# Altium PCB TruckCape for Hammond 1455L - Rev4 - MITM.PcbDoc
Units mil, origin at the board's own origin, x right, y up, seen from the top; angles counter-clockwise.
Board outline 3917.04 x 4734.44 mil, 2 copper layers (Component Side, Bottom Layer), stack 12.8 mil thick; 48 components, 66 nets, 355 pads, 31 vias.
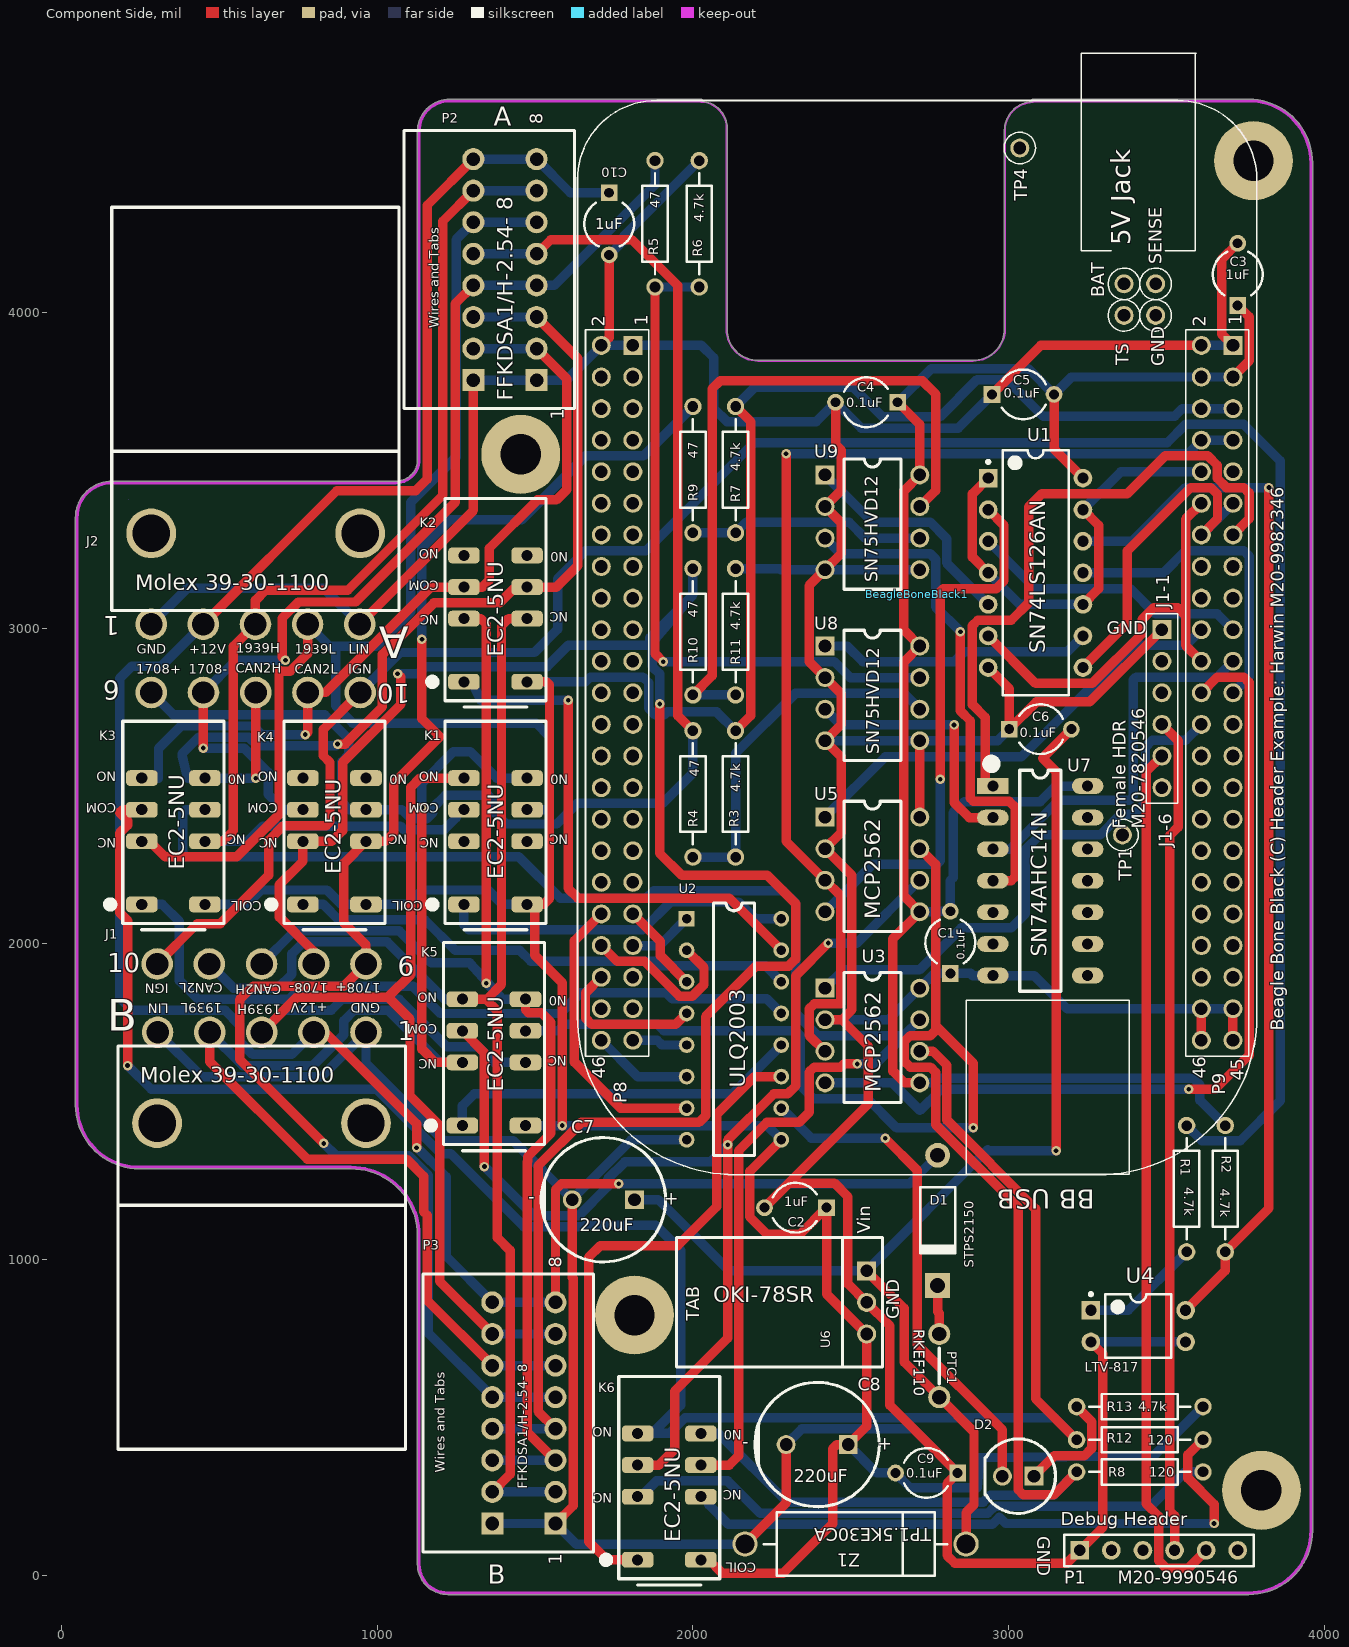
[diagram p0: Component Side view]
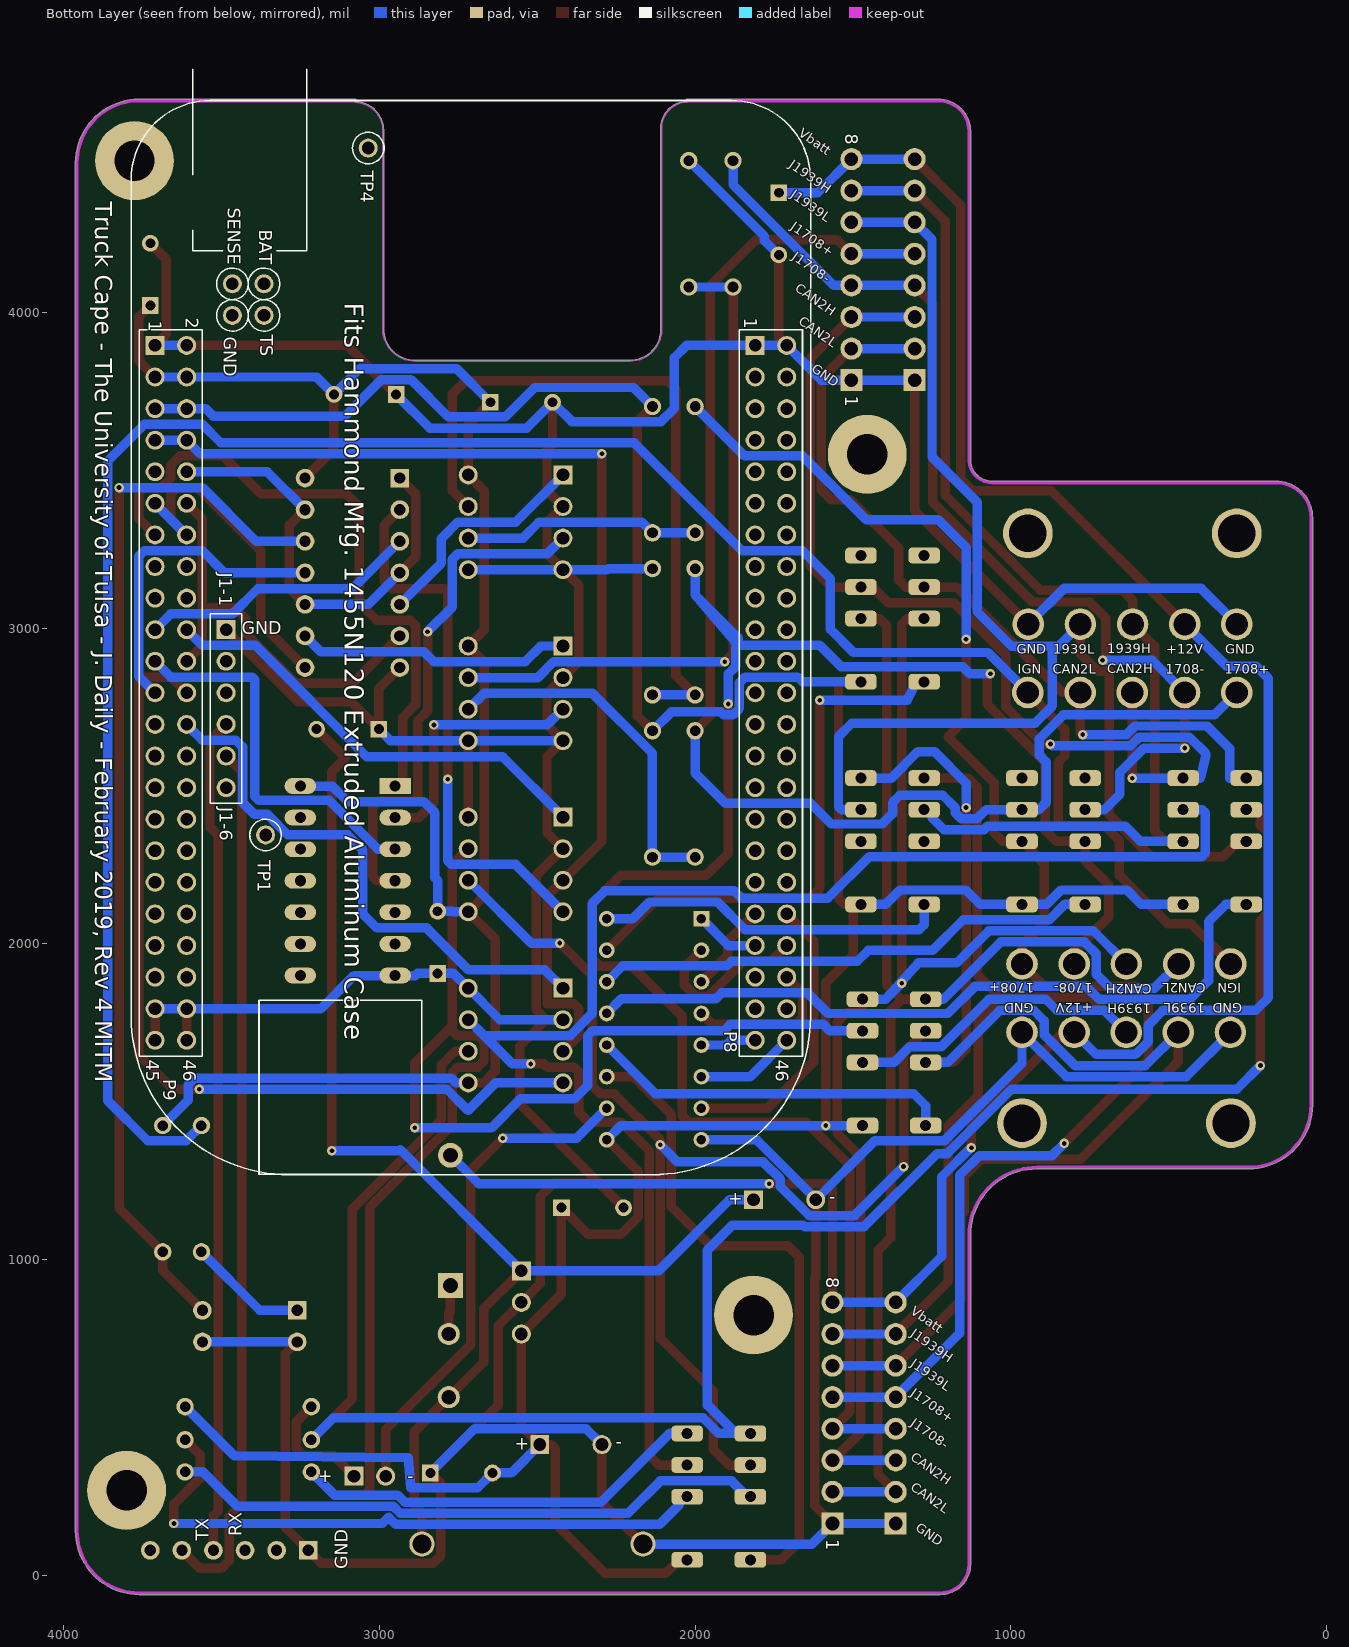
[diagram p1: Bottom Layer view, seen from below]

## Layer stack, top to bottom
Top Solder: solder mask 0.4, Solder Resist, Dk 3.5
Component Side: signal copper 1.4
Dielectric 1: core 10, FR-4, Dk 4.2
Bottom Layer: signal copper 1.4
Solder Side: solder mask 0.4, Solder Resist, Dk 3.5

## Board outline
44.99,1489.82 cw(c246.85,1489.85) 44.99,1489.85 44.98,1489.85 44.98,3350 cw(c160,3350) 160,3465.02 cw(c160,3460) 160.03,3465.01 1059.98,3465.01 ccw(c1059.5,3533.5) 1127.99,3533.5 ccw(c1059.5,3533.5) 1127.99,3533.97 cw(c1133,3534) 1127.98,3534 1127.98,4573 cw(c1229.41,4573) 1229.35,4674.42 cw(c1229.41,4669.41) 1229.41,4674.43 2024.38,4674.43 cw(c2024.38,4669.41) 2029.4,4669.41 cw(c2024.38,4669.41) 2029.05,4667.57 cw(c2024.38,4583.64) 2108.44,4583.69 cw(c2105.92,4583.64) 2108.44,4583.64 2108.44,3945.4 cw(c2105.92,3945.4) 2108.44,3945.35 cw(c2205.92,3945.4) 2108.44,3945.4 ccw(c2105.92,3945.4) 2108.44,3945.4 2108.44,3945.35 ccw(c2205.92,3945.4) 2205.87,3847.91 ccw(c2205.92,3945.4) 2205.92,3847.91 2886.92,3847.91 cw(c2886.92,3845.4) 2886.98,3847.91 ccw(c2886.98,3947.34) 2986.41,3947.28 2986.41,4575.72 cw(c3077.62,4575.72) 3073.32,4666.82 cw(c3077.62,4669.41) 3077.62,4674.43 3760.16,4674.43 cw(c3760.16,4669.41) 3760.24,4674.42 ccw(c3760.16,4472.56) 3760.16,4674.42 3760.24,4674.42 cw(c3760.16,4472.56) 3962.02,4472.59 cw(c3760.16,4472.56) 3962.02,4472.56 ccw(c3957.01,4472.56) 3962.02,4472.59 3962.02,4472.56 3962.02,141.85 cw(c3957.01,141.85) 3962.02,141.82 ccw(c3760.16,141.85) 3962.02,141.85 3962.02,141.82 cw(c3760.16,141.85) 3760.19,-60.01 cw(c3760.16,141.85) 3760.16,-60.01 ccw(c3760.16,-55) 3760.19,-60.01 3760.16,-60.01 1224,-60.01 cw(c1224,36) 1127.98,36 1127.98,1077.01 ccw(c917.01,1077.01) 917.01,1287.99 246.85,1287.99 cw(c246.85,1489.85)

## Design rules (kind name [scope] priority, off if disabled: settings)
Clearance [All] p1: gap=5 ignorepadtopadclearanceinfootprint=FALSE except(0: Arc-Hole Track-Hole SMDPad-Hole THPad-Hole Via-Hole Fill-Hole Poly-Hole Region-Hole Text-Hole)
HoleSize [All] p1: absolutevalues=TRUE maxlimit=250 minlimit=13 maxpercent=80.000 minpercent=20.000
MinimumSolderMaskSliver [All] p1: minsoldermaskwidth=1
PolygonConnect [All] p1: connectstyle=Relief reliefconductorwidth=10 reliefentries=4 polygonreliefangle="90 Angle" airgapwidth=10
RoomDefinition "TruckCape BeagleBone Headers v4 - MITM" [InComponentClass('TruckCape BeagleBone Headers v4 - MITM')] p1: confinementstyle=ConfineIn formatcopy=TRUE lockcomponents=FALSE outline -6912.02,-3824.24 -4912.02,-3824.24 -4912.02,-2824.24 -6912.02,-2824.24
RoutingVias [All] p1: holewidth=15 width=30 viastyle="Through Hole" minholewidth=13 minwidth=20 maxholewidth=20 maxwidth=30
SilkToSilkClearance [All] p1: silktosilkclearance=1
SilkToSolderMaskClearance [IsPad] p1: minsilkscreentomaskgap=1 clearancetoexposedcopper=TRUE
SolderMaskExpansion [All] p1: expansion=4
Width [All] p1: maxlimit=100 minlimit=10 preferedwidth=30 minimp=50.000000 maximp=50.000000 favimp=50.000000
26 further rules are at their usual default settings.

## Classes and differential pairs
component class "TruckCape J1708 and Relays v4 - MITM": C1 C5 J1 J2 K1 K2 K3 K4 K5 K6 P2 P3 R3 R4 R5 R6 R7 R8 R9 R10 R11 R12 U7 U8 U9
component class "TruckCape BeagleBone Headers v4 - MITM": BeagleBoneBlack1 C2 C3 C4 C6 C7 C8 C9 C10 D1 D2 P1 PTC1 R1 R2 R13 U1 U2 U3 U4 U5 U6 U? Z1

## Components (designator, comment, footprint, x,y, rotation, side; value= is the part's Value field where it differs from the comment)
BeagleBoneBlack1 "BeagleBoneBlack" Beagleboneblack 4220,3141.5 r90 top locked
C1 "0.1uF" CAPR5-4X5 2815,2005 r90 top
C2 "1uF" CAPR5-4X5 2325,1165 r180 top
C3 "1uF" CAPR5-4X5 3725,4120 r90 top
C4 "0.1uF" CAPR5-4X5 2550,3715 r180 top
C5 "0.1uF" CAPR5-4X5 3045,3740 r0 top
C6 "0.1uF" CAPR5-4X5 3100,2680 r0 top
C7 "220uF" "Elec. Cap 5 x 10mm" 1815,1190 r180 top
C8 "220uF" "Elec. Cap 5 x 10mm" 2491.85,415 r180 top
C9 "0.1uF" CAPR5-4X5 2740,325 r180 top
C10 "1uF" CAPR5-4X5 1735,4280 r270 top
D1 "STPS2150" DO-41 2775,1125 r270 top
D2 "LED" "LED - 5mm Through Hole" 3080,315 r0 top
J1 "Molex 39-30-1100" "10 pos Mini-Fit Jr. R/A Header" 965,1720 r0 top locked
J2 "Molex 39-30-1100" "10 pos Mini-Fit Jr. R/A Header" 284.99,3012.6 r180 top locked
K1 "EC2-5NU Relay-DPDT" "RELAY - EC2" 1275,2125 r90 top locked
K2 "EC2-5NU Relay-DPDT" "RELAY - EC2" 1275,2830 r90 top
K3 "EC2-5NU Relay-DPDT" "RELAY - EC2" 255,2125 r90 top locked
K4 "EC2-5NU Relay-DPDT" "RELAY - EC2" 765,2125 r90 top locked
K5 "EC2-5NU Relay-DPDT" "RELAY - EC2" 1270,1425 r90 top
K6 "EC2-5NU Relay-DPDT" "RELAY - EC2" 1825,50 r90 top
P1 "Use this part in J1-1 to J1-6" HDR1X6 3225,80 r0 top
P2 "Header 8H" "8 CKT Spring Header" 1505,3785 r90 top
P3 "Header 8H" "8 CKT Spring Header" 1565,165 r90 top
PTC1 "RKEF110" PTC 2780,640 r270 top
R1 "4.7k" Axial-0.4 3563.23,1225 r270 top
R2 "4.7k" Axial-0.4 3685.67,1225 r270 top
R3 "4.7k" Axial-0.4 2135,2475 r90 top
R4 "47" Axial-0.4 2000,2475 r90 top
R5 "47" Axial-0.4 1880,4280 r90 top
R6 "4.7k" Axial-0.4 2020,4280 r90 top
R7 "4.7k" Axial-0.4 2135,3501.67 r90 top
R8 "120" Axial-0.4 3415,328.23 r0 top
R9 "47" Axial-0.4 2000,3501.67 r90 top
R10 "47" Axial-0.4 2000,2988.33 r90 top
R11 "4.7k" Axial-0.4 2135,2988.33 r90 top
R12 "120" Axial-0.4 3415,430 r0 top
R13 "4.7k" AXIAL-0.4 3415,535 r180 top
U1 "SN74LS126AN" N14A 3085,3175 r0 top
U2 "ULQ2003" DIP16 1980,2080 r0 top
U3 "MCP2562" DIP8 2418.42,1860 r0 top
U4 "LTV-817" DIP-4 3410,790 r0 top
U5 "MCP2562" DIP8 2418.42,2401.67 r0 top
U6 "OKI-78SR" OKI-78SR 2550,765 r90 top
U7 "SN74AHC14N" DIP14 2950,2500 r0 top
U8 "SN75HVD12" DIP8 2418.42,2943.33 r0 top
U9 "SN75HVD12" DIP8 2418.42,3485 r0 top
Z1 "TP1.5KE30CA" DIODE-0.7 2515,100 r0 top

## Footprints (in the part's own frame and the unit in brackets; to place one, negate y for a bottom-side part, rotate by r counter-clockwise, add the part's x,y. Pads: shape width x height; smd on the part's side, far side on the other; paste and mask are expansions set on the pad)
"8 CKT Spring Header" [mil] "8 Position Wire to Board Terminal Block Vertical with Board 0.100\" (2.54mm) Through Hole"
  rect 70x70 hole 43: 1(0,200) 1(0,0)
  round 70 hole 43: 2(100,200) 2(100,0) 3(200,0) 3(200,200) 4(300,0) 4(300,200) 5(400,0) 5(400,200) 6(500,0) 6(500,200) 7(600,0) 7(600,200) 8(700,0) 8(700,200)
  silkscreen extent -90,-120 790,420
"10 pos Mini-Fit Jr. R/A Header" [mm] "Molex 10 position Mini-Fit Jr. Right Angle Header with Pegs, Series 5569"
  round 4 hole 3: 0(-16.8,-7.3) 0(0,-7.3)
  round 2.54 hole 1.803: 1(0,0) 2(-4.191,0) 3(-8.382,0) 4(-12.573,0) 5(-16.764,0) 6(0,5.5) 7(-4.2,5.5) 8(-8.4,5.5) 9(-12.6,5.5) 10(-16.8,5.5)
  silkscreen extent -19.94,-33.53 3.17,-1.1
Axial-0.4 [mm] "Axial Device, Thru-Hole; 2 Leads; 0.4 in Pin Spacing"
  round 1.4 hole 0.85: 1(-5.08,0) 2(5.08,0)
  silkscreen extent -4.06,-1.02 4.06,1.02
AXIAL-0.4 [mm] "Axial Device, Thru-Hole; 2 Leads; 0.4 in Pin Spacing"
  round 1.4 hole 0.85: 1(-5.08,0) 2(5.08,0)
  silkscreen extent -4.06,-1.02 4.06,1.02
Beagleboneblack [mil] "Flipped Headers, testpoints and Overlay for a BBB Rev C"
  rect 60x60 hole 40 mask+2: 1(753.5,510) J1-1(-146.5,735) P1(753.5,2410)
  round 60 hole 40 mask+2: 2(753.5,610) 3(653.5,510) 4(653.5,610) 5(553.5,510) 6(553.5,610) 7(453.5,510) 8(453.5,610) 9(353.5,510) 10(353.5,610) 11(253.5,510) 12(253.5,610) 13(153.5,510) 14(153.5,610) 15(53.5,510) 16(53.5,610) 17(-46.5,510) 18(-46.5,610) 19(-146.5,510) 20(-146.5,610) 21(-246.5,510) 22(-246.5,610) 23(-346.5,510) 24(-346.5,610) 25(-446.5,510) 26(-446.5,610) 27(-546.5,510) 28(-546.5,610) 29(-646.5,510) 30(-646.5,610) 31(-746.5,510) 32(-746.5,610) 33(-846.5,510) 34(-846.5,610) 35(-946.5,510) 36(-946.5,610) 37(-1046.5,510) 38(-1046.5,610) 39(-1146.5,510) 40(-1146.5,610) 41(-1246.5,510) 42(-1246.5,610) 43(-1346.5,510) 44(-1346.5,610) 45(-1446.5,510) 46(-1446.5,610) J1-2(-246.5,735) J1-3(-346.5,735) J1-4(-446.5,735) J1-5(-546.5,735) J1-6(-646.5,735) P2(753.5,2510) P3(653.5,2410) P4(653.5,2510) P5(553.5,2410) P6(553.5,2510) P7(453.5,2410) P8(453.5,2510) P9(353.5,2410) P10(353.5,2510) P11(253.5,2410) P12(253.5,2510) P13(153.5,2410) P14(153.5,2510) P15(53.5,2410) P16(53.5,2510) P17(-46.5,2410) P18(-46.5,2510) P19(-146.5,2410) P20(-146.5,2510) P21(-246.5,2410) P22(-246.5,2510) P23(-346.5,2410) P24(-346.5,2510) P25(-446.5,2410) P26(-446.5,2510) P27(-546.5,2410) P28(-546.5,2510) P29(-646.5,2410) P30(-646.5,2510) P31(-746.5,2410) P32(-746.5,2510) P33(-846.5,2410) P34(-846.5,2510) P35(-946.5,2410) P36(-946.5,2510) P37(-1046.5,2410) P38(-1046.5,2510) P39(-1146.5,2410) P40(-1146.5,2510) P41(-1246.5,2410) P42(-1246.5,2510) P43(-1346.5,2410) P44(-1346.5,2510) P45(-1446.5,2410) P46(-1446.5,2510) TP1(-796.5,860) TP4(1378.5,1185) TP5(948.5,855) TP6(948.5,755) TP7(848.5,855) TP8(848.5,755)
  silkscreen extent -1872,434 1678,2586
CAPR5-4X5 [mm] "Capacitor; 2 Leads"
  rect 1.35x1.35 hole 0.8: 1(-2.5,0)
  round 1.35 hole 0.8: 2(2.5,0)
  silkscreen extent -1.69,-2 1.82,2
DIODE-0.7 [mil] "Diode, Thru-Hole; 2 Leads; 0.7 in Pin Spacing"
  round 80 hole 60: 1(-350,0) 2(350,0)
  silkscreen extent -290,-100 290,100
DIP8 [mil]
  rect 60x60 hole 40: 1(0,0)
  round 60 hole 40: 2(0,-100) 3(0,-200) 4(0,-300) 5(300,-300) 6(300,-200) 7(300,-100) 8(300,0)
  silkscreen extent 60,-362 240,50
DIP14 [mil]
  rect 100x50 hole 35: 1(0,0)
  oval 100x50 hole 35: 2(0,-100) 3(0,-200) 4(0,-300) 5(0,-400) 6(0,-500) 7(0,-600) 8(300,-600) 9(300,-500) 10(300,-400) 11(300,-300) 12(300,-200) 13(300,-100) 14(300,0)
  silkscreen extent -19,-650 215,84
DIP16 [mil]
  rect 50x50 hole 30: 1(0,0)
  round 50 hole 30: 2(0,-100) 3(0,-200) 4(0,-300) 5(0,-400) 6(0,-500) 7(0,-600) 8(0,-700) 9(300,-700) 10(300,-600) 11(300,-500) 12(300,-400) 13(300,-300) 14(300,-200) 15(300,-100) 16(300,0)
  silkscreen extent 85,-750 215,50
DIP-4 [mm] "DIP; 4 Leads; Row Spacing 7.62 mm; Pitch 2.54 mm"
  rect 1.5x1.5 hole 0.9: 1(-3.81,1.27)
  round 1.5 hole 0.9: 2(-3.81,-1.27) 3(3.81,-1.27) 4(3.81,1.27)
  silkscreen extent -3.93,-2.55 2.65,2.69, body extent -3.15,-2.5 3.15,2.5, height 5.6
DO-41 [mm] "Diode, Axial; Body 5.2 x 2.7 mm (LxDia. max), Lead Dia. 0.86 mm (max)"
  round 2 hole 1.2: 1(-5.23,0)
  rect 2x2 hole 1.2: 2(5.23,0)
  silkscreen extent -2.65,-1.4 2.75,1.4
"Elec. Cap 5 x 10mm" [mil] "2 lead polarized Radial Capacitor with 5 mm lead spacing and 10 mm diameter can"
  rect 60x60 hole 40: 1(0,0)
  round 60 hole 40: 2(196.85,0)
  silkscreen extent -98,-197 295,197
HDR1X6 [mm] "Connector; Header; 6 Position"
  rect 1.5x1.5 hole 0.9: 1(0,0)
  round 1.5 hole 0.9: 2(2.54,0) 3(5.08,0) 4(7.62,0) 5(10.16,0) 6(12.7,0)
  silkscreen extent -1.27,-1.27 13.97,1.27
"LED - 5mm Through Hole" [mil] "Vishay TLCS510 Ultrabright LED, Ø 5 mm Untinted Non-Diffused Package"
  rect 60x60 hole 40: 1(0,0)
  round 60 hole 40: 2(-100,0)
  silkscreen extent -155,-118 68,118
N14A [mm] "DIP, 14-Leads, Row Spacing 7.62mm, Pitch 2.54mm, Body 19.18x6.35mm"
  rect 1.5x1.5 hole 0.9: 1(-3.81,7.62)
  round 1.5 hole 0.9: 2(-3.81,5.08) 3(-3.81,2.54) 4(-3.81,0) 5(-3.81,-2.54) 6(-3.81,-5.08) 7(-3.81,-7.62) 8(3.81,-7.62) 9(3.81,-5.08) 10(3.81,-2.54) 11(3.81,0) 12(3.81,2.54) 13(3.81,5.08) 14(3.81,7.62)
  silkscreen extent -3.93,-9.85 2.65,9.85, body extent -3.55,-9.85 3.55,9.85, height 5.08
OKI-78SR [mil] "Horizontal Mount SIP DC/DC Converter"
  rect 60x60 hole 40: 1(200,0)
  round 60 hole 40: 2(100,0) 3(0,0)
  silkscreen extent -105,-50 305,602
PTC [mil] "TE RGEF600-2"
  round 70 hole 45: 1(-125,0) 2(75,0)
  silkscreen extent -80,0 33,0
"RELAY - EC2" [mil] "EC2 Relay"
  rrect50% 50x100 hole 35: 1(300,0) 2(200,0) 3(400,0) 4(300,-200) 5(200,-200) 6(400,-200) 7(0,-200) 8(0,0)
  silkscreen extent -80,-260 580,110

## Part data
BeagleBoneBlack1: "46 Positions Header, Breakaway Connector 0.100\" (2.54mm) Through Hole Tin", Manufacturer="Sullins Connector Solutions", PartNumber=PREC023DAAN-RC, Supplier Part Number 1=S2012EC-23-ND, Supplier 1=Digi-Key
C1 C4 C5 C6 C9: library part Cap, "CAP CER 0.1UF 100V X7R RADIAL", Manufacturer="Vishay BC Components", PartNumber=K104K20X7RH53H5, Supplier Part Number 1=BC5139-ND, Supplier 1=Digi-Key
C2 C3 C10: library part Cap, "CAP CER 1UF 100V X7R RADIAL", Manufacturer="Murata Electronics North America", PartNumber=RDER72A105K2M1H03A, Supplier Part Number 1=490-9198-1-ND, Supplier 1=Digi-Key
C7 C8: library part "Electrolytic Cap", "220µF 50V Aluminum Electrolytic Capacitors Radial, Can 175 mOhm @ 10kHz 5000 Hrs @ 105°C", Manufacturer="EPCOS (TDK)", PartNumber=B41858C6227M000, Supplier Part Number 1=495-6000-ND, Supplier 1=Digi-Key
D1: library part "Diode 1N4003", "Diode Schottky 150V 2A Through Hole DO-15", Manufacturer=STMicroelectronics, Supplier Part Number 1=497-3213-1-ND, PartNumber=STPS2150, Supplier 1=Digi-Key
D2: "Green 569nm LED Indication - Discrete 2.1V Radial", Manufacturer="Lite-On Inc.", PartNumber=LTL-4233, Supplier Part Number 1=160-1130-ND, Supplier 1=Digi-Key
J1 J2: library part "10 Pos Header", "10 Positions Header Connector 0.165\" (4.20mm) Through Hole, Right Angle Tin", Manufacturer=Molex, PartNumber=39-30-1100, Supplier Part Number 1=WM1355-ND, Supplier 1=Digi-Key
K1 K2 K3 K4 K5 K6: library part Relay-DPDT, "General Purpose Relay DPDT (2 Form C) Through Hole", Manufacturer=KEMET, PartNumber=EC2-5NU, Supplier Part Number 1=399-11052-5-ND, LatestRevisionDate=17-Jul-2002, LatestRevisionNote="Re-released for DXP Platform.", PackageDescription="Relay; 8 Leads", PackageReference=DIP-P8, Published=24-Mar-1999, Publisher="Altium Limited", Supplier 1=Digi-Key
P1: library part "Header 6", "CONN HEADER FEMALE 6POS .1\" GOLD", Manufacturer="Sullins Connector Solutions", PartNumber=PPPC061LFBN-RC, Supplier Part Number 1=S7039-ND, Supplier 1=Digi-Key
P2 P3: "8 Position Wire to Board Terminal Block Vertical with Board 0.100\" (2.54mm) Through Hole", Manufacturer="Phoenix Contact", PartNumber=1789472, Supplier Part Number 1=277-14044-ND, LatestRevisionDate=17-Jul-2002, LatestRevisionNote="Re-released for DXP Platform.", Publisher="Altium Limited", Supplier 1=Digi-Key
PTC1: library part "SMD Resistor", "Polymeric PTC Resettable Fuse 60V 1.1A Ih Through Hole Radial, Disc", Manufacturer="Littelfuse Inc.", Supplier Part Number 1=RKEF110HF-ND, PartNumber=RKEF110, Supplier 1=Digi-Key
R1 R2 R3 R6 R7 R11: library part "Chip Resistor", "RES SMD 4.7K OHM 1% 1/10W 0603", Manufacturer=Yageo, PartNumber=CFR-25JB-52-4K7, Supplier Part Number 1=4.7KQBK-ND, Supplier 1=Digi-Key
R4 R5 R9 R10: library part "Chip Resistor", "47 Ohms ±5% 0.25W, 1/4W Through Hole Resistor Axial  Carbon Film", Manufacturer=Yageo, PartNumber=CFR-25JB-52-47R, Supplier Part Number 1=47QBK-ND, Supplier 1=Digi-Key
R8 R12: library part "Chip Resistor", "120 Ohms ±0.1% 0.25W, 1/4W Through Hole Resistor Axial  Metal Film", Manufacturer=Yageo, PartNumber=MFP-25BRD52-120R, Supplier Part Number 1=120ADCT-ND, Supplier 1=Digi-Key
R13: library part Res2, "RES SMD 4.7K OHM 1% 1/10W 0603", Manufacturer=Yageo, PartNumber=CFR-25JB-52-4K7, Supplier Part Number 1=4.7KQBK-ND, LatestRevisionDate=17-Jul-2002, LatestRevisionNote="Re-released for DXP Platform.", PackageDescription="Axial Device, Thru-Hole; 2 Leads; 0.4 in Pin Spacing", PackageReference=AXIAL-0.4, Published=8-Jun-2000, Publisher="Altium Limited", Supplier 1=Digi-Key
U1: library part DM74LS126AN, "Quad 3-State Buffer", Manufacturer="Texas Instruments", Supplier Part Number 1=296-3643-5-ND, ComponentLink1Description="Manufacturer Link", ComponentLink1URL=http://www.fairchildsemi.com/, DatasheetVersion=Mar-1998, LatestRevisionDate=29-May-2009, LatestRevisionNote="Component Body Added.", PackageDescription="DIP, 14-Pin, Row Spacing 7.62 mm, Pitch 2.54 mm", PackageReference=N14A, PackageVersion=2000, PartNumber=SN74LS126AN, Published=17-Jul-2002, Publisher="Altium Limited", Supplier 1=Digi-Key
U2: "High voltage, high current Darlington arrays each containing seven open collector Darlington pairswith common emitters.", Manufacturer="Texas Instruments", PartNumber=ULQ2003AN, Supplier Part Number 1=296-22623-5-ND, Supplier 1=Digi-Key
U3 U5: library part SN65HVD232DR, "1/1 Transceiver Half CAN 8-PDIP", Drivers Per Package=1, Manufacturer="Microchip Technology", PartNumber=MCP2562-E/P, Rating=Catalog, Supplier Part Number 1=MCP2562-E/P-ND, Supply Voltage(s)(V)=3.3, Code_JEDEC=MS-012AA, ComponentLink1Description=Datasheet, ComponentLink1URL=http://www.ti.com/general/docs/lit/getliterature.tsp?genericPartNumber=SN65HVD232&fileType=pdf, DatasheetVersion=SLOS346K, Eco-Plan="Green (RoHS & no Sb/Br)", ICC(Max)(mA)=17, Isolated=No, Mounting Technology="Surface Mount", PackageDescription="8-Pin Plastic Small Outline Integrated Circuit, 4.9 x 3.9 mm, Pitch 1.27 mm Pitch", PackageReference=D8, PackageVersion="revM, Jun-2011", Receivers Per Package=1, SubFamily=CAN, Supplier 1=Digi-Key, Supplier 2=Digi-Key, Supplier 3=Digi-Key, Supplier 4=Newark, Supplier 5=Mouser, Supplier Part Number 2=296-26344-1-ND, Supplier Part Number 3=296-26344-6-ND, Supplier Part Number 4=75C7753, Supplier Part Number 5=595-SN65HVD232DR, Transient Pulse Protection(V)="-25 to 25"
U4: library part Optoisolator1, "Optoisolator Transistor Output 5000Vrms 1 Channel 4-DIP", Manufacturer="Lite-On Inc.", Supplier Part Number 1=160-1366-5-ND, DatasheetVersion=Nov-2003, LatestRevisionDate=04-Mar-2005, LatestRevisionNote="Sch pins 3 & 4 Swapped.", PackageReference=DIP-4, PartNumber=LTV-817, Published=24-Mar-1999, Publisher="Altium Limited", Supplier 1=Digi-Key
U6: library part 7805, "5V DC/DC Converter (7805 replacement)", Manufacturer="Murata Power Solutions Inc.", PartNumber=OKI-78SR-5/1.5-W36H-C, Supplier Part Number 1=811-2692-ND, Supplier 1=Digi-Key, Supplier 2=Digi-Key, Supplier Part Number 2=811-2692-ND
U7: library part "74VHC14 Hex Inverter", "Inverter IC 6 Channel Schmitt Trigger 14-PDIP", Manufacturer="Texas Instruments", Supplier Part Number 1=296-4550-5-ND, PartNumber=SN74AHC14N, Supplier 1=Digi-Key
U8 U9: library part "SN75HVD12D (3.3v RS485)", "IC 3.3V DIFF TXRX 8-SOIC", Manufacturer="Texas Instruments", PartNumber=SN75HVD12P, Supplier 1=Digi-Key, Supplier Part Number 1=SN75HVD12P
Z1: library part Zener, "TVS DIODE 25.6V 41.4V DO201", Manufacturer="Littelfuse Inc.", Supplier Part Number 1=F7610CT-ND, PartNumber=TP1.5KE30CA, Supplier 1=Digi-Key

## Free pads (board coordinates)
  round 250 hole 128: 0(1455,3550) 0(1815,825) 0(3775,4480) 0(3800,270)

## Via types
v1: diameter 30, hole 15, Component Side to Bottom Layer, 31 vias

## Nets (pads, with @x,y where several pads share a name; then routed paths per layer and width w, separated by ;. In a path a pad name is that pad's centre, name@x,y a point inside that pad or via, vN(x,y) a via of type N, cw(c..) or ccw(c..) an arc to the next point about the centre after c; other vN are vias at no path point)
3V3: BeagleBoneBlack1.3 BeagleBoneBlack1.4 C1.2 C3.1 C4.1 C5.2 R2.1 U1.14 U3.5 U5.5 U7.14 U8.8 U9.8 | length 6032.1
  Component Side w30: C4.1 2718.42,3645 U9.8 2667.98,3434.56 2667.98,2993.78 U8.8 2667.98,2892.89 2667.98,2152.11 U5.5 2633.42,2016.67 2633.42,1597.56 2670.98,1560 U3.5 ; C5.2 3143.43,3566.57 U1.14 ; BeagleBoneBlack1.3 3760.98,3845.98 3760.98,3985.59 C3.1
  Bottom Layer w30: C4.1 2755,3821.58 3061.85,3821.58 C5.2 3198.43,3795 BeagleBoneBlack1.4 BeagleBoneBlack1.3 ; U3.5 2756.72,1560 2771.72,1575 3584.5,1575 3605,1554.5 3605,1505.67 R2.1 ; U5.5 2764.98,2101.67 2766.74,2103.43 C1.2 2815,2200.76 2823.98,2209.74 2823.98,2415.76 2858.98,2450.76 3099.98,2450.76 3149.22,2500 U7.14
5V0: BeagleBoneBlack1.5 BeagleBoneBlack1.6 C2.1 C8.1 C9.2 K1.7 K2.7 K3.7 K4.7 K5.7 K6.7 R3.2 R7.2 R13.1 U2.9 U6.3 | length 10631.6
  Component Side w30: K1.7 K1.7@1499.98,2125 ; K2.7 1535.98,2830 1545.98,2820 1545.98,2143.76 1527.22,2125 K1.7@1499.98,2125 ; v1(1585.98,1425) 1585.98,1877.76 1499.98,1963.76 K1.7@1499.98,2125 ; K6.7 2049.98,50 2092.22,7.76 2285.98,7.76 2442.98,164.76 2442.98,402 2455.98,415 C8.1 2550,473.15 U6.3 2423.43,891.57 C2.1 2339.19,1080.76 2234.98,1080.76 2179.98,1135.76 2179.98,1279.98 U2.9 ; R3.2 2182.98,2722.98 2182.98,3653.68 R7.2
  Bottom Layer w30: K3.7 587.22,2125 632.98,2170.76 841.22,2170.76 886.98,2125 K4.7 1097.22,2125 1142.98,2170.76 1351.22,2170.76 1396.98,2125 K1.7 ; K5.7 v1(1585.98,1425) 2235,1425 U2.9 ; K2.7 1659.98,2830 1674.98,2845 1841.74,2845 1860,2826.74 1860,2745.5 1880.5,2725 1909.5,2725 1919.26,2734.76 2075.24,2734.76 R3.2 ; R7.2 2195.1,3761.76 2507.64,3761.76 2600.98,3668.42 2781.83,3668.42 2899.98,3786.58 2993.15,3786.58 3108.96,3670.76 3525,3670.76 3549.24,3695 BeagleBoneBlack1.6 BeagleBoneBlack1.5 ; C8.1 2581.85,325 C9.2 2688.15,278.42 2899.75,278.42 2907.98,373.76 3458.76,378.76 R13.1
12V0: C6.2 C7.1 PTC1.2 U6.1 Z1.2 | length 3995.6
  Component Side w30: U6.1 2668.98,846.02 2668.98,676.02 PTC1.2 2889.98,455.02 2889.98,224.76 2865,199.78 Z1.2 ; v1(3150,1345) 3150,2545.54 3106.98,2588.56 C6.2
  Bottom Layer w30: C7.1 1890.74,1190 2115.74,965 U6.1 2933.76,1348.76 2937.52,1345 v1(3150,1345)
CAN2H-A: J2.8 K2.4 K3.6 P2.3 | length 3226.2
  Component Side w30: v1(615.7,2525) J2.8 ; v1(874.98,2632.76) 898.98,2632.76 1016.98,2750.76 1016.98,2916.76 1179.98,3079.76 1387.74,3079.76 1437.98,3130 K2.4 1567.98,3130 1635,3197.02 1635,3855 P2.3@1505,3985
  Bottom Layer w30: v1(615.7,2525) K3.6 399.98,2525 382.98,2594.76 382.98,2602.48 435.5,2655 593.24,2655 620.48,2627.76 869.98,2627.76 v1(874.98,2632.76) ; P2.3@1305,3985 P2.3@1505,3985
CAN2H-B: J1.8 K2.2 K5.6 P3.3 | length 4044.8
  Component Side w30: K2.2 1327.98,3030 1345.98,3012 v1(1345.98,1875.76) ; K5.6 1470,1791.76 1479,1782.76 1519.98,1782.76 1550.59,1752.15 1550.59,1400.37 1476.98,1326.76 1476.98,1311.76 1474.98,1309.76 1474.98,455.02 P3.3@1565,365
  Bottom Layer w30: J1.8 739.29,2041.54 1070,2041.54 1171.77,1939.76 1292.98,1939.76 1348.66,1878.18 1396.74,1825 ; v1(1345.98,1875.76) 1396.74,1825 ; P3.3@1365,365 P3.3@1565,365 ; K5.6 1396.74,1825
CAN2L-A: J2.9 K2.1 K3.3 P2.2 | length 2619.7
  Component Side w30: v1(772.98,2662.76) 781.05,2670.83 J2.9 837.28,2796.06 1171.22,3130 K2.1 1333.22,3130 1354.98,3151.76 1354.98,3252.76 1507.98,3405.76 1567.98,3405.76 1600,3437.78 1600,3790 P2.2@1505,3885
  Bottom Layer w30: K3.3 307.98,2525 307.98,2618.76 379.22,2690 607.74,2690 634.98,2662.76 v1(772.98,2662.76) ; P2.2@1305,3885 P2.2@1505,3885
CAN2L-B: J1.9 K2.5 K5.3 P3.2 | length 4191.1
  Component Side w30: K5.3 1343.98,1825 ; P3.2@1365,265 1420.98,320.98 1420.98,1029.76 1380.98,1069.76 1380.98,1788 1343.98,1825 ; K2.5 1416.22,3030 1393.98,3007.76 1393.98,1871.76 1347.22,1825 1343.98,1825
  Bottom Layer w30: J1.9 545.47,1860 685.88,1860 729.65,1903.76 729.65,1968.2 767.98,2006.54 1032.45,2006.54 1213.98,1825 K5.3 ; P3.2@1365,265 P3.2@1565,265
"Coil 1": K1.8 U2.16 | length 1134
  Bottom Layer w30: K1.8 1274.98,2060.76 1290.74,2045 1841.22,2045 1928.98,2132.76 2143.98,2132.76 2196.74,2080 U2.16
"Coil 2": K2.8 U2.15 | length 1718.6
  Component Side w30: v1(1604.98,2771.76) 1604.98,2176 1635.98,2145 2115,2145 U2.15
  Bottom Layer w30: K2.8 1299.98,2830 1327.98,2771.76 v1(1604.98,2771.76)
"Coil 3": K4.8 U2.14 | length 1616.5
  Bottom Layer w30: K4.8 829.98,2125 878.22,2076.76 1150.98,2076.76 1247.98,1979.76 1451.98,1979.76 1486.74,1945 1884.98,1945 1899.22,1930.76 2229.24,1930.76 U2.14
"Coil 4": K3.8 U2.13 | length 2365.3
  Bottom Layer w30: K3.8 319.98,2125 373.98,2071 373.98,1884 432.98,1825 721.08,1825 761.84,1865.76 1113.98,1865.76 1199.98,1779.76 1578.74,1779.76 1643.98,1845 1915.74,1845 1934.98,1825.76 2234.24,1825.76 U2.13
"Coil 5": K5.8 U2.12 | length 1152.4
  Bottom Layer w30: K5.8 1269.98,1487.76 1307.98,1525.76 2125.76,1525.76 U2.12
"Coil 6": K6.8 U2.11 | length 2097.4
  Component Side w30: K6.8 1727.74,50 1669.98,107.76 1669.98,1007.76 1706.98,1044.76 1951.98,1044.76 2074.98,1167.76 2074.98,1460.35 2194.64,1580 U2.11
DCAN0H: K5.4 K6.6 R8.1 U5.7 | length 5885.8
  Component Side w30: U5.7 2768.42,2251.67 2768.42,1741.32 ; v1(2887.98,1417.76) 2887.98,1621.76 2768.42,1741.32 ; R8.1 3142.53,255.76 3046,255.76 3030,271.76 3030,1166.74 2768.42,1428.32 2768.42,1593.56 2751.98,1610 2687.98,1610 2668.42,1629.56 2668.42,1690.44 2687.98,1710 2751.98,1710 2768.42,1726.44 2768.42,1741.32
  Bottom Layer w30: K5.4 1573.98,1725 1593.98,1745 1888.74,1745 1907.98,1725.76 2323.98,1725.76 2339.98,1709.76 2339.98,1551.76 2381.98,1509.76 2552.86,1509.76 2644.86,1417.76 v1(2887.98,1417.76) ; K6.6 2080.74,450 2298.51,232.23 2918.88,232.23 2941.65,255 3141.77,255 R8.1
DCAN0L: K5.1 K6.1 U5.6 | length 3740.3
  Component Side w30: K5.1 1340,1655 v1(1340,1295) ; K6.1 1892.22,350 1941.98,399.76 1941.98,583.76 2109.98,751.76 v1(2109.98,1364.24) 2109.98,1379 2255.98,1525 2300,1525 2325.98,1550.98 2325.98,1900 v1(2428.74,2002.76)
  Bottom Layer w30: v1(1340,1295) 1495,1140 1638.86,1140 1729.98,1231.12 1729.98,1255.26 1784.72,1310 2055.74,1310 v1(2109.98,1364.24) ; v1(2428.74,2002.76) 2519.52,2002.76 U5.6
DCAN1H: K3.4 K6.4 U3.7 | length 4865.2
  Component Side w30: K6.4 2114.98,350 2144.98,380 2144.98,1345.76 2233.98,1434.76 2335.98,1434.76 2367.98,1466.76 2367.98,1594 2383.98,1610 2468.87,1610 2478.87,1620 v1(2520,1620)
  Bottom Layer w30: K3.4 394.22,2425 384.98,2415.76 384.98,2287.76 396.98,2275.76 1449.22,2275.76 1579.98,2145 1853.22,2145 1875.98,2167.76 2285.98,2167.76 2325.98,2127.76 2325.98,1779.52 2395.51,1710 2668.42,1710 ; v1(2520,1620) 2578.42,1620 2668.42,1710 ; U3.7 2668.42,1710
DCAN1L: K3.1 K6.3 R12.1 U3.6 | length 6419.4
  Component Side w30: v1(210,1615) 210,2074.04 185,2099.04 185,2350.96 210,2375.96 210,2390.74 184.98,2415.76 194.22,2425 K3.1 ; U3.6 2759.74,1660 2803.98,1615.76 2803.98,1442.26 3084.98,1161.26 3084.98,560.02 R12.1
  Bottom Layer w30: v1(210,1615) 285,1540 997.74,1540 1201.98,1335.76 1233.98,1335.76 1464.74,1105 1653.36,1105 1657.12,1108.76 1882.98,1108.76 1960.98,1030.76 1960.98,540 K6.3@1870.98,450 ; K6.3 K6.3@1870.98,450 ; R12.1 3145,500 1974.98,500 1924.98,450 K6.3@1870.98,450
DEBUGRX: BeagleBoneBlack1.J1-4 P1.4 | length 2653.1
  Component Side w30: BeagleBoneBlack1.J1-4 3535.98,2644.02 3535.98,2369.76 3509.98,2343.76 3509.98,204.76 3525,189.74 P1.4
DEBUGTX: BeagleBoneBlack1.J1-5 P1.5 | length 2768.6
  Component Side w30: BeagleBoneBlack1.J1-5 3434.98,2544.98 3434.98,227.76 3474.98,187.76 3474.98,47.76 3499.98,22.76 3567.76,22.76 P1.5
GND: BeagleBoneBlack1.1 BeagleBoneBlack1.2 BeagleBoneBlack1.43 BeagleBoneBlack1.44 BeagleBoneBlack1.45 BeagleBoneBlack1.46 BeagleBoneBlack1.J1-1 BeagleBoneBlack1.P1 BeagleBoneBlack1.P2 C1.1 C2.2 C3.2 C4.2 C5.1 C6.1 C7.2 C8.2 C9.1 C10.2 J1.1 J1.5 J2.1 J2.5 P1.1 P2.1 P3.1 R6.2 R11.2 U1.7 U2.8 U3.2 U3.8 U4.2 U4.3 U5.2 U5.8 U6.2 U7.7 U8.2 U8.4 U8.5 U9.2 U9.4 U9.5 Z1.1 | length 20403.5
  Component Side w30: J2.5 1305,3372.61 P2.1@1305,3785 ; P3.1@1565,165 1620.98,220.98 1620.98,940.76 1618.15,943.59 C7.2 ; BeagleBoneBlack1.P2 1735,3920 C10.2 ; Z1.1 2295,230 C8.2 ; C2.2 2304.34,1242.76 ; U3.2 2471.19,1760 ; C4.2 2451.57,3581.17 2468.98,3563.76 2468.98,3435.56 U9.2 2468.98,3334.44 2468.98,3235.56 U9.4 2367.98,3134.56 2367.98,2893.78 U8.2 2468.98,2792.78 2468.98,2693.89 U8.4 2468.98,2592.78 2468.98,2352.22 U5.2 2503.42,2216.67 2503.42,1791.76 2471.66,1760 2471.19,1760 ; U5.8 U8.5 ; U1.7 3001.57,2808.43 C6.1 3087.74,2766.17 3256.17,2766.17 BeagleBoneBlack1.J1-1 ; C5.1 3101.57,3895 BeagleBoneBlack1.2 ; U4.2 3297.56,702.44 3297.56,152.56 P1.1 3184.76,39.76 2828.98,39.76 2804.98,63.76 2804.98,291.56 C9.1 2623.98,539.44 2623.98,791.02 U6.2 2490.98,924.02 2490.98,1199.76 2447.98,1242.76 2304.34,1242.76 ; BeagleBoneBlack1.46 BeagleBoneBlack1.44 ; BeagleBoneBlack1.45 BeagleBoneBlack1.43 ; BeagleBoneBlack1.1 3673.98,3931.02 3673.98,4167.41 C3.2 ; 2304.34,1242.76 2555,1493.42 2555,1676.19 2471.19,1760
  Bottom Layer w30: J2.1 398.15,3125.76 831.82,3125.76 J2.5 ; J1.5 445,1580 825,1580 J1.1 965,1622.24 1209.88,1377.36 1430.79,1377.36 C7.2 1618.15,1192.92 1805.23,1380 U2.8 ; P2.1@1305,3785 1505,3785 1600,3785 BeagleBoneBlack1.P2 BeagleBoneBlack1.P1 2026.74,3895 2065.98,3855.76 2065.98,3695.76 2107.98,3653.76 2390.34,3653.76 C4.2 2533.15,3633.42 2840,3633.42 C5.1 ; P3.1@1365,165 1565,165 1630,100 Z1.1 ; C10.2 1780.98,4227.56 1780.98,4240.98 R6.2 ; R11.2 2274.98,3188.33 2278.32,3185 U9.4 U9.5 ; C8.2 2345,465 2698.43,465 C9.1 ; U3.2 2618.42,1760 U3.8 2765,1906.57 C1.1 2878.98,1906.57 2885.56,1900 U7.7 3079.98,1900 3184.98,1795 BeagleBoneBlack1.44 BeagleBoneBlack1.43 ; U8.4 U8.5 2964.91,2643.33 C6.1 ; U4.2 U4.3 ; BeagleBoneBlack1.2 BeagleBoneBlack1.1
IGNITION: J1.10 J2.10 R1.1 | length 7065.6
  Component Side w30: J1.10 430.81,2063.76 502.98,2063.76 656.98,2217.76 656.98,2327.76 703.98,2374.76 838.98,2374.76 850.98,2386.76 850.98,2574.44 829.78,2595.64 829.78,2679.44 J2.10
  Bottom Layer w30: J2.10 1073.1,2922.76 1497.98,2922.76 1571.98,2996.76 1571.98,3157 1659.98,3245 1851.22,3245 2192.98,3586.76 3501.74,3586.76 3559.98,3645 3743.98,3645 3858.98,3530 3858.98,1502.76 3732.98,1376.76 3611.47,1376.76 R1.1
J1708+A: J2.6 K4.4 P2.5 R4.2 | length 4483.1
  Component Side w30: P2.5@1505,4185 1549.76,4229.76 1806.98,4229.76 1951.98,4084.76 1951.98,2723.02 R4.2
  Bottom Layer w30: J2.6 355.29,2725.76 834.03,2725.76 909.98,2649.81 909.98,2597.76 888.73,2576.51 888.73,2447.76 911.49,2425 K4.4 1078.74,2425 1106.98,2396.76 1157.98,2396.76 1176.98,2415.76 1176.98,2431.76 1215.98,2470.76 1351.98,2470.76 1374.98,2447.76 1374.98,2412.76 1407.98,2379.76 1568.74,2379.76 1633.98,2445 1903.98,2445 2000,2541.02 R4.2 ; P2.5@1305,4185 P2.5@1505,4185
J1708+B: J1.6 K4.5 P3.5 R9.2 | length 4947.4
  Component Side w30: v1(831.26,1368.49) 564.98,1634.76 564.98,1823.54 607.98,1866.54 895,1866.54 J1.6 965,1996.74 894.98,2066.76 894.98,2254.98 K4.5 1026.22,2325 1052.98,2351.76 1052.98,2509.76 1198.98,2655.76 1141.98,2712.76 v1(1141.98,2965)
  Bottom Layer w30: v1(831.26,1368.49) 869.69,1330.05 1099.98,1330.05 1161.98,1268.05 1161.98,768.02 1365,565 P3.5@1565,565 ; v1(1141.98,2965) 1141.98,3254.76 1230.98,3343.76 1458.74,3343.76 1659.98,3545 1843.33,3545 R9.2
J1708-A: J2.7 K4.1 P2.4 R5.2 | length 3245.4
  Component Side w30: v1(450,2620) 450,2795.72 J2.7 ; v1(709.99,2898.35) 700,2908.33 700,3031.6 750.99,3082.6 931.82,3082.6 1246.98,3397.76 1246.98,4026.98 P2.4@1305,4085
  Bottom Layer w30: v1(450,2620) 578.74,2620 654.98,2543.76 654.98,2474 703.98,2425 K4.1 ; J2.7 552.62,2898.35 v1(709.99,2898.35) ; P2.4@1305,4085 1505,4085 1561.22,4085 1880,4403.78 R5.2
J1708-B: J1.7 K4.2 P3.4 R10.2 | length 6195.5
  Component Side w30: J1.7 799.65,1976.1 690.98,2084.76 690.98,2187.74 765,2261.76 K4.2 857.22,2325 890.98,2358.76 890.98,2574.44 1075,2758.46 1075,2845.76 v1(1065,2855.76) ; P3.4@1565,465 1509.98,520.02 1509.98,1297.76 1646.98,1434.76 2018.98,1434.76 2039.98,1455.76 2039.98,1769.86 2199.89,1929.76 2302.98,1929.76 2325,1951.78 2325,2127.76 2235,2217.76 1964.02,2217.76 1895,2286.78 v1(1895,2760)
  Bottom Layer w30: v1(1065,2855.76) 1130.98,2855.76 1153.36,2878.14 1538.13,2878.14 1604.98,2945 1863.98,2945 ; P3.4@1365,465 P3.4@1565,465 ; v1(1895,2760) 1895,2854.82 1870.98,2878.84 1870.98,2938 1863.98,2945 ; R10.2 2000,3105.02 ; 1863.98,2945 1863.98,2969 2000,3105.02 ; 1863.98,2945 2000,3105.02
J1939H-A: J2.3 K1.1 K3.5 P2.7 | length 3683.3
  Component Side w30: K3.5 511.98,2325 544.98,2358 544.98,2942.59 J2.3 614.99,3087.76 646.99,3119.76 906.98,3119.76 1207.98,3420.76 1207.98,4287.98 P2.7@1305,4385
  Bottom Layer w30: K3.5 589.98,2325 637.98,2373 1073.74,2373 1084.98,2361.76 1211.98,2361.76 1249.98,2399.76 1249.98,2425 K1.1 ; P2.7@1305,4385 P2.7@1505,4385
J1939H-B: J1.3 K1.3 K5.5 P3.7 | length 3690.3
  Component Side w30: J1.3 746.54,1831.54 1034.76,1831.54 ; 1040,1831.54 1034.76,1831.54 ; K1.3 1135.98,2525 1106.98,2496 1106.98,1903.76 1034.76,1831.54 ; P3.7@1365,765 1198.6,931.4 1198.6,1425.15 1104.28,1519.46 1104.28,1762.01 1034.76,1831.54
  Bottom Layer w30: J1.3 705,1790 854.98,1790 889.98,1825 1070,1825 1220.24,1674.76 1320.22,1674.76 1369.98,1625 K5.5 ; P3.7@1365,765 P3.7@1565,765
J1939L-A: J2.4 K1.4 K3.2 P2.6 | length 4304.1
  Component Side w30: K3.2 279.98,2325 329.22,2275.76 555.48,2275.76 689.48,2409.76 689.48,2867.26 691.57,2867.26 695.49,2863.35 724.49,2863.35 779.99,2918.85 J2.4
  Bottom Layer w30: J2.4 849.99,2942.6 ; K1.4 1535.98,2425 1545.98,2435 1545.98,2656.76 1503.98,2698.76 923.73,2698.76 868.98,2753.51 868.98,2923.6 849.99,2942.6 ; P2.6@1505,4285 1305,4285 1249.98,4229.98 1249.98,3541.76 1106.98,3398.76 1106.98,3051.76 997.82,2942.6 849.99,2942.6
J1939L-B: J1.4 K1.6 K5.2 P3.6 | length 4216.1
  Component Side w30: J1.4 470,1627.74 778.98,1318.76 1092.98,1318.76 1147.98,1263.76 1147.98,1151.76 1158.98,1140.76 1158.98,871.02 P3.6@1365,665 ; v1(1141.98,2431.76) 1141.98,1667 1183.98,1625 K5.2
  Bottom Layer w30: J1.4 575,1615 796.98,1615 895,1713.02 895,1757.02 927.98,1790 1035,1790 1200,1625 K5.2 ; v1(1141.98,2431.76) 1141.98,2508.76 1241.98,2608.76 1294.98,2608.76 1378.74,2525 K1.6 ; P3.6@1365,665 P3.6@1565,665
LED1: BeagleBoneBlack1.P38 U2.7 | length 919.8
  Component Side w30: BeagleBoneBlack1.P38 1624.98,2009.98 1624.98,1625.76 1770.74,1480 U2.7
NetBeagleBoneBlack1_9: BeagleBoneBlack1.9
NetBeagleBoneBlack1_10: BeagleBoneBlack1.10 U1.1 U1.4 U1.10 U1.13 | length 1449
  Component Side w30: U1.4 2884.98,3225.02 2884.98,3424.98 U1.1 ; U1.10 3284.98,3124.98 3284.98,3325.02 U1.13
  Bottom Layer w30: U1.4 3035,3075 U1.10 ; U1.13 3355,3495 BeagleBoneBlack1.10
NetBeagleBoneBlack1_11: BeagleBoneBlack1.11 BeagleBoneBlack1.14 U1.8 | length 1096.2
  Component Side w30: U1.8 3375.98,3015.98 3375.98,3244.76 3576.22,3445 3639.74,3445 3660.98,3423.76 3660.98,3345.98 BeagleBoneBlack1.14
  Bottom Layer w30: BeagleBoneBlack1.14@3610,3295.02 BeagleBoneBlack1.11
NetBeagleBoneBlack1_12: BeagleBoneBlack1.12 BeagleBoneBlack1.22 U1.6 | length 1364.9
  Component Side w30: U1.6 3085.24,2824.76 3263.98,2824.76 3422.98,2983.76 3422.98,3028.76 3459.22,3065 3535,3065 3559.98,3040.02 ; BeagleBoneBlack1.22 3559.98,2945.02 3559.98,3040.02 ; BeagleBoneBlack1.12 3559.98,3344.98 3559.98,3040.02
NetBeagleBoneBlack1_13: BeagleBoneBlack1.13 U7.1 | length 2052.8
  Component Side w30: U7.1 2924.98,2500 2924.98,2717.76 2884.98,2757.76 2884.98,3007.76 2901.98,3024.76 3007.98,3024.76 3062.98,3079.76 3062.98,3383.76 3103.98,3424.76 3374.74,3424.76 3494.98,3545 3630.71,3545 3660,3515.71 3660,3474.29 3689.29,3445 3743.98,3445 3760.98,3428 3760.98,3345.98 BeagleBoneBlack1.13
NetBeagleBoneBlack1_16: BeagleBoneBlack1.16
NetBeagleBoneBlack1_19: BeagleBoneBlack1.19 U1.3 | length 891
  Bottom Layer w30: U1.3 3085.24,3124.76 3384.98,3124.76 3464.74,3045 3660,3045 BeagleBoneBlack1.19
NetBeagleBoneBlack1_20: BeagleBoneBlack1.20 U5.1 | length 1437.3
  Bottom Layer w30: U5.1 2609.52,2592.76 3039.98,2592.76 3392.22,2945 3560,2945 BeagleBoneBlack1.20
NetBeagleBoneBlack1_21: BeagleBoneBlack1.21 U7.3 | length 1222.9
  Bottom Layer w30: U7.3 3004.22,2300 3158.98,2454.76 3382.2,2454.76 3394.98,2467.54 3394.98,2837 3402.98,2845 3660,2845 BeagleBoneBlack1.21
NetBeagleBoneBlack1_23: BeagleBoneBlack1.23 U1.11 | length 1016.1
  Bottom Layer w30: U1.11 3489.98,3175 3559.98,3245 3743.98,3245 3760.98,3228 3760.98,2845.98 BeagleBoneBlack1.23
NetBeagleBoneBlack1_24: BeagleBoneBlack1.24 U3.4 | length 2810.2
  Component Side w30: v1(3570,1540) 3653.22,1540 3760.98,1647.76 3760.98,2828 3743.98,2845 3660,2845 BeagleBoneBlack1.24
  Bottom Layer w30: U3.4 2631.74,1560 2718.98,1472.76 2786.22,1540 v1(3570,1540)
NetBeagleBoneBlack1_26: BeagleBoneBlack1.26 U3.1 | length 1759.5
  Bottom Layer w30: U3.1 2476.19,1917.76 2716.98,1917.76 2849.98,2050.76 3007.98,2050.76 3052.98,2095.76 3052.98,2298.76 3099.98,2345.76 3290.05,2345.76 3354.29,2410 3395.22,2410 3432.98,2447.76 3432.98,2623.76 3454.22,2645 3560,2645 BeagleBoneBlack1.26
NetD1_2: D1.2 PTC1.1 | length 156.2
  Component Side w30: D1.2 2775,835 2780,830 PTC1.1
NetD2_1: D2.1 R13.2 | length 371.1
  Component Side w30: D2.1 3143.76,378.76 3238.98,378.76 3262.56,402.34 3262.56,487.44 R13.2
NetD2_2: D2.2 U2.10 | length 1591.9
  Component Side w30: v1(2608.98,1384.76) 2709.98,1283.76 2709.98,731.76 2980,461.74 D2.2
  Bottom Layer w30: U2.10 2375.24,1384.76 v1(2608.98,1384.76)
NetK6_2: K6.2 R8.2 | length 1907.3
  Bottom Layer w30: K6.2 1834.98,250 1884.74,299.76 2109.98,299.76 2212.51,197.23 2933.38,197.23 2956.15,220 3450.22,220 3558.45,328.23 R8.2
NetK6_5: K6.5 R12.2 | length 2013.1
  Component Side w30: R12.2 3566.98,381.98 3567.44,381.52 3567.44,308.53 3650,225.97 v1(3650,165)
  Bottom Layer w30: K6.5 2049.98,250 2049.98,224.76 2112.51,162.23 2947.88,162.23 2970.65,185 2990.65,165 v1(3650,165)
NetR1_2: R1.2 U4.1 | length 379.9
  Bottom Layer w30: U4.1 3378.23,840 R1.2
NetR2_2: R2.2 U1.12 U4.4 | length 3373.7
  Component Side w30: U4.4 3685.67,965.67 R2.2 3823.98,1163.31 v1(3823.98,3445)
  Bottom Layer w30: U1.12 3389.98,3275 3559.98,3445 v1(3823.98,3445)
NetR3_1: R3.1 R4.1 U8.6 | length 1146.4
  Bottom Layer w30: R4.1 R3.1 2135,2603.76 2324.57,2793.33 2668.42,2793.33 U8.6
NetR5_1: R5.1 R6.1 U8.7 | length 2170.6
  Component Side w30: R5.1 1880,2919.32 v1(1905.98,2893.33)
  Bottom Layer w30: R5.1 R6.1 ; v1(1905.98,2893.33) 2447.98,2893.33 2497.98,2843.33 U8.7
NetR7_1: R7.1 R9.1 U9.6 | length 752.9
  Bottom Layer w30: R9.1 R7.1 2168.33,3335 2494.98,3335 2544.98,3285 U9.6
NetR10_1: R10.1 R11.1 U9.7 | length 2242.1
  Component Side w30: R10.1 2060.98,2849.32 2060.98,3757.76 2085.98,3782.76 2726.98,3782.76 2768.98,3740.76 2768.98,3435.56 U9.7
  Bottom Layer w30: R10.1 R11.1
NetU1_2: U1.2 U5.4 | length 1746.4
  Component Side w30: v1(2782.98,2521.76) 2782.98,3115.76 2791.98,3124.76 2959.98,3124.76 2984.98,3149.76 2984.98,3325.02 U1.2
  Bottom Layer w30: U5.4 2568.42,2251.67 2771.98,2251.67 2782.98,2262.67 v1(2782.98,2521.76)
NetU1_5: U1.5 U9.1 | length 731.5
  Bottom Layer w30: U9.1 2568.42,3335 2751.98,3335 2803.42,3283.56 2803.42,3206.58 U1.5
NetU1_9: U1.9 U8.1 | length 871.1
  Bottom Layer w30: U8.1 2488.42,2943.33 2538.42,2893.33 2826.98,2893.33 2858.41,2924.76 3184.76,2924.76 U1.9
NetU7_2: U7.2 U8.3 | length 817.6
  Component Side w30: v1(2826.98,2693.33) 2826.98,2447.76 2874.74,2400 U7.2
  Bottom Layer w30: U8.3 2468.42,2693.33 v1(2826.98,2693.33)
NetU7_4: U7.4 U9.3 | length 1630.3
  Component Side w30: v1(2846.98,2988.76) 2846.98,2737.76 2877.98,2706.76 2877.98,2461.76 2887.98,2451.76 3000.98,2451.76 3020.98,2431.76 3020.98,2213 3007.98,2200 U7.4
  Bottom Layer w30: U9.3 2468.42,3235 2751.98,3235 2768.42,3218.56 2768.42,3067.32 v1(2846.98,2988.76)
RAW: C10.1 D1.1 J1.2 J2.2 P2.8 P3.8 | length 7469
  Component Side w30: J2.2 872.39,3435 1122.22,3435 1158.98,3471.76 1158.98,4338.98 P2.8@1305,4485 ; J1.2 835.74,1720 1125,1430.74 v1(1125,1355) ; P3.8@1565,865 1565,1221.78 1583.98,1240.76 v1(1764.98,1240.76)
  Bottom Layer w30: J2.2 317.15,2879.76 223.98,2879.76 184.98,2840.76 184.98,1829.76 224.74,1790 518.74,1790 564.98,1743.76 564.98,1691.02 606,1650 730,1650 J1.2 ; v1(1125,1355) 1125,1356.75 1218.98,1262.76 1218.98,1011.02 1365,865 P3.8@1565,865 ; P2.8@1305,4485 1505,4485 1611.57,4378.43 C10.1 ; v1(1764.98,1240.76) 2684.86,1240.76 D1.1
"Switch 1": BeagleBoneBlack1.P39 U2.1 | length 205.2
  Bottom Layer w30: BeagleBoneBlack1.P39 1895,1995 U2.1
"Switch 2": BeagleBoneBlack1.P40 U2.2 | length 538.1
  Component Side w30: BeagleBoneBlack1.P40 1760,1945 1846.74,1945 1956.98,1834.76 1998.4,1834.76 2035.12,1871.48 2035.12,1924.88 U2.2
"Switch 3": BeagleBoneBlack1.P37 U2.3 | length 285.4
  Component Side w30: BeagleBoneBlack1.P37 1896.98,2008.02 1896.98,1963.02 U2.3
"Switch 4": BeagleBoneBlack1.P42 U2.4 | length 493.5
  Component Side w30: BeagleBoneBlack1.P42 1659.98,1844.98 1659.98,1765 1679.98,1745 1945,1745 U2.4
"Switch 5": BeagleBoneBlack1.P45 U2.5 | length 176.2
  Bottom Layer w30: BeagleBoneBlack1.P45 1886.98,1695 1901.98,1680 U2.5
"Switch 6": BeagleBoneBlack1.P46 U2.6 | length 317.6
  Bottom Layer w30: BeagleBoneBlack1.P46 1825,1580 U2.6
"SYS 5V": BeagleBoneBlack1.7 BeagleBoneBlack1.8 U3.3 U5.3 | length 3508.5
  Component Side w30: v1(2294.98,3551.76) 2294.98,2325.11 U5.3 2468.42,2151.67 2468.42,1810 2383.98,1810 2367.98,1794 2367.98,1710.44 U3.3
  Bottom Layer w30: v1(2294.98,3551.76) 3566.76,3551.76 BeagleBoneBlack1.8 BeagleBoneBlack1.7
pads on no net: BeagleBoneBlack1.15 BeagleBoneBlack1.17 BeagleBoneBlack1.18 BeagleBoneBlack1.25 BeagleBoneBlack1.27 BeagleBoneBlack1.28 BeagleBoneBlack1.29 BeagleBoneBlack1.30 BeagleBoneBlack1.31 BeagleBoneBlack1.32 BeagleBoneBlack1.33 BeagleBoneBlack1.34 BeagleBoneBlack1.35 BeagleBoneBlack1.36 BeagleBoneBlack1.37 BeagleBoneBlack1.38 BeagleBoneBlack1.39 BeagleBoneBlack1.40 BeagleBoneBlack1.41 BeagleBoneBlack1.42 BeagleBoneBlack1.J1-2 BeagleBoneBlack1.J1-3 BeagleBoneBlack1.J1-6 BeagleBoneBlack1.P3 BeagleBoneBlack1.P4 BeagleBoneBlack1.P5 BeagleBoneBlack1.P6 BeagleBoneBlack1.P7 BeagleBoneBlack1.P8 BeagleBoneBlack1.P9 BeagleBoneBlack1.P10 BeagleBoneBlack1.P11 BeagleBoneBlack1.P12 BeagleBoneBlack1.P13 BeagleBoneBlack1.P14 BeagleBoneBlack1.P15 BeagleBoneBlack1.P16 BeagleBoneBlack1.P17 BeagleBoneBlack1.P18 BeagleBoneBlack1.P19 BeagleBoneBlack1.P20 BeagleBoneBlack1.P21 BeagleBoneBlack1.P22 BeagleBoneBlack1.P23 BeagleBoneBlack1.P24 BeagleBoneBlack1.P25 BeagleBoneBlack1.P26 BeagleBoneBlack1.P27 BeagleBoneBlack1.P28 BeagleBoneBlack1.P29 BeagleBoneBlack1.P30 BeagleBoneBlack1.P31 BeagleBoneBlack1.P32 BeagleBoneBlack1.P33 BeagleBoneBlack1.P34 BeagleBoneBlack1.P35 BeagleBoneBlack1.P36 BeagleBoneBlack1.P41 BeagleBoneBlack1.P43 BeagleBoneBlack1.P44 BeagleBoneBlack1.TP1 BeagleBoneBlack1.TP4 BeagleBoneBlack1.TP5 BeagleBoneBlack1.TP6 BeagleBoneBlack1.TP7 BeagleBoneBlack1.TP8 J1.0 J2.0 K1.2 K1.5 K2.3 K2.6 K4.3 K4.6 P1.2 P1.3 P1.6 U7.5 U7.6 U7.8 U7.9 U7.10 U7.11 U7.12 U7.13

## Keep-outs
Keep-Out Layer:
  region: 212.07,3406.45
  region: 212.07,3406.45
  region: 212.07,3406.45
  region: 212.07,3406.45
  region: 212.07,3406.45
  region: 212.07,3406.45
  region: 212.07,3406.45
  region: 212.07,3406.45
  region: 212.07,3406.45
  region: 212.07,3406.45
  region: 212.07,3406.45
  region: 212.07,3406.45
  region: 212.07,3406.45
  region: 212.07,3406.45
  region: 212.07,3406.45
  region: 212.07,3406.45
  region: 212.07,3406.45
  region: 212.07,3406.45
  region: 212.07,3406.45
  region: 212.07,3406.45
  region: 212.07,3406.45
  region: 212.07,3406.45
  region: 212.07,3406.45
  region: 212.07,3406.45
  lines w5: 2024.38,4665.19 cw(c2024.38,4583.64) 2105.92,4583.64 2105.92,3945.4 ccw(c2205.92,3945.4) 2205.92,3845.4 2886.92,3845.4 ccw(c2886.98,3947.34) 2988.92,3947.28 2988.92,4575.72 cw(c3077.62,4575.72) 3077.62,4664.41
  lines w10: 2024.38,4669.41 1686.63,4669.41 1229.41,4669.41 ccw(c1229.41,4573) 1133,4573 1133,4200 1133,3534 cw(c1059.5,3533.5) 1060,3460 160,3460 ccw(c160,3350) 50,3350 50,1489.85 ; 3077.62,4669.41 3760.16,4669.41 cw(c3760.16,4472.56) 3957.01,4472.56 ; 50,1489.85 ccw(c246.85,1489.85) 246.85,1293 ; 50,1489.85 ccw(c246.85,1489.85) 246.85,1293 ; 246.85,1293 917.01,1293 ; 246.85,1293 917.01,1293 ; 917.01,1293 cw(c917.01,1077.01) 1133,1077.01 ; 917.01,1293 cw(c917.01,1077.01) 1133,1077.01 ; 1133,36 ccw(c1224,36) 1224,-55 ; 1133,36 ccw(c1224,36) 1224,-55 ; 1133,36 1133,1077.01 ; 1133,36 1133,1077.01 ; 1224,-55 3760.16,-55 ; 1224,-55 3760.16,-55 ; 3760.16,-55 ccw(c3760.16,141.85) 3957.01,141.85 ; 3957.01,141.85 3957.01,4472.56 ; 3957.01,141.85 3957.01,4472.56

## Silkscreen, mask and mechanical layers (free items; w line width, h text height)
Top Overlay:
  text "A" at 1370,4590 h60
  text "A" at 1100,3005 h100 r180
  text "GND" at 3310,2980 h40
  text "1939H" at 553.73,2922.01 h30
  text "LIN" at 910.23,2919.01 h30
  text "GND" at 239.23,2918.01 h30
  text "+12V" at 405.48,2918.01 h30
  text "1939L" at 739.98,2918.01 h30
  text "EC2-5NU" at 1400,2910 h50 r90
  text "CAN2H" at 552.73,2859.01 h30
  text "IGN" at 909.23,2856.01 h30
  text "1708+" at 238.23,2855.01 h30
  text "1708-" at 404.48,2855.01 h30
  text "CAN2L" at 738.98,2855.01 h30
  text "Female HDR / M20-7820546" at 3430,2365 h40 r90
  text "EC2-5NU" at 390,2235 h50 r90
  text "EC2-5NU" at 885,2220 h50 r90
  text "EC2-5NU" at 1400,2205 h50 r90
  text "CAN2L" at 511.02,1874.99 h30 r180
  text "1708-" at 845.52,1874.99 h30 r180
  text "1708+" at 1011.77,1874.99 h30 r180
  text "IGN" at 340.77,1873.99 h30 r180
  text "CAN2H" at 697.27,1870.99 h30 r180
  text "1939L" at 510.02,1811.99 h30 r180
  text "+12V" at 844.52,1811.99 h30 r180
  text "GND" at 1010.77,1811.99 h30 r180
  text "LIN" at 339.77,1810.99 h30 r180
  text "1939H" at 696.27,1807.99 h30 r180
  text "B" at 145,1725 h100
  text "Beagle Bone Black (C) Header Example: Harwin M20-9982346" at 3870,1725 h40 r90
  text "EC2-5NU" at 1400,1531.34 h50 r90
  text "Debug Header" at 3165,160 h40
  text "GND" at 3090,125 h40 r270
  text "EC2-5NU" at 1960,105 h50 r90
  text "B" at 1350,-25 h60
  text "M20-9990546" at 3345,-25 h40
Bottom Overlay:
  text "Vbatt" at 1675,4560 h30 r35
  text "J1939H" at 1705,4460 h30 r35
  text "J1939L" at 1700,4365.16 h30 r35
  text "Truck Cape - The University of Tulsa - J. Daily - February 2019, Rev 4 MITM" at 3900,4350 h54 r90
  text "J1708+" at 1700,4265 h30 r35
  text "J1708-" at 1695,4170.16 h30 r35
  text "CAN2H" at 1686.63,4070 h30 r35
  text "Fits Hammond Mfg. 1455N120 Extruded Aluminum Case" at 3110,4030 h60 r90
  text "CAN2L" at 1675,3965 h30 r35
  text "GND" at 1634.5,3815 h30 r35
  text "GND" at 3435,2980 h40
  text "1939H" at 694.69,2920.01 h30
  text "GND" at 322.19,2918.01 h30
  text "+12V" at 508.44,2918.01 h30
  text "1939L" at 865.94,2918.01 h30
  text "GND" at 982.19,2918.01 h30
  text "CAN2H" at 695.69,2857.01 h30
  text "1708+" at 323.19,2855.01 h30
  text "1708-" at 509.44,2855.01 h30
  text "CAN2L" at 866.94,2855.01 h30
  text "IGN" at 979.21,2855.01 h30
  text "IGN" at 270.79,1874.99 h30 r180
  text "CAN2L" at 383.06,1874.99 h30 r180
  text "1708-" at 740.56,1874.99 h30 r180
  text "1708+" at 926.81,1874.99 h30 r180
  text "CAN2H" at 554.31,1872.99 h30 r180
  text "GND" at 267.81,1811.99 h30 r180
  text "1939L" at 384.06,1811.99 h30 r180
  text "+12V" at 741.56,1811.99 h30 r180
  text "GND" at 927.81,1811.99 h30 r180
  text "1939H" at 555.31,1809.99 h30 r180
  text "Vbatt" at 1320,830.16 h30 r35
  text "J1939H" at 1320,758.9 h30 r35
  text "J1939L" at 1320,664.71 h30 r35
  text "J1708+" at 1320,570.51 h30 r35
  text "J1708-" at 1320,476.32 h30 r35
  text "CAN2H" at 1320,367.79 h30 r35
  text "CAN2L" at 1320,273.6 h30 r35
  text "GND" at 1305,145 h30 r35
  text "RX" at 3435,125 h40 r270
  text "TX" at 3540,110 h40 r270
  text "GND" at 3100,20 h40 r270

## Dimensions
2780,765 to 2780,565 on Mechanical 1

## Text inside footprints (layer, text, board x,y; h text height)
BeagleBoneBlack1: Top Overlay "TP4" at 3059,4352.5 h40 r90; Top Overlay "TP1" at 3390,2200 h40 r90; Top Overlay "J1-6" at 3516,2305.5 h40 r90; Top Overlay "J1-1" at 3509,3062.5 h40 r90; Top Overlay "BAT" at 3302,4047.5 h40 r90; Top Overlay "SENSE" at 3485,4151.5 h40 r90; Top Overlay "GND" at 3492,3829.5 h40 r90; Top Overlay "TS" at 3380.3,3831.51 h40 r90; Top Overlay "P8" at 1790,1495 h40 r90; Top Overlay "46" at 1722,1573.5 h40 r90; Top Overlay "1" at 1857,3957.5 h40 r90; Top Overlay "2" at 1721,3954.5 h40 r90; Top Overlay "46" at 3624,1572.5 h40 r90; Top Overlay "45" at 3744,1566.5 h40 r90; Top Overlay "2" at 3623,3954.5 h40 r90; Top Overlay "1" at 3737,3959.5 h40 r90; Top Overlay "BB USB" at 3272.13,1222.13 h60 r180; Top Overlay "P9" at 3685,1522.5 h40 r90; Top Overlay "5V Jack" at 3385,4211.5 h60 r90; Bottom Overlay "TP4" at 3059,4448.1 h40 r90; Bottom Overlay "TP1" at 3385,2265 h40 r90; Bottom Overlay "J1-6" at 3505,2432.5 h40 r90; Bottom Overlay "J1-1" at 3507,3175.76 h40 r90; Bottom Overlay "BAT" at 3380,4261.5 h40 r90; Bottom Overlay "SENSE" at 3480,4331.5 h40 r90; Bottom Overlay "GND" at 3492,3923.19 h40 r90; Bottom Overlay "TS" at 3377,3928.5 h40 r90; Bottom Overlay "1" at 1845,3982.16 h40 r90; Bottom Overlay "P8" at 1908,1723 h40 r90; Bottom Overlay "46" at 1745,1633 h40 r90; Bottom Overlay "P9" at 3684,1571.5 h40 r90; Bottom Overlay "2" at 3612,3982.5 h40 r90; Bottom Overlay "46" at 3620,1633.5 h40 r90; Bottom Overlay "1" at 3730,3972.5 h40 r90; Bottom Overlay "45" at 3738,1633.16 h40 r90
C7: Top Overlay "+" at 1955,1210 h40 r180; Top Overlay "-" at 1500,1210 h40 r180; Bottom Overlay "-" at 1575,1210 h40 r180; Bottom Overlay "+" at 1895,1210 h40 r180
C8: Top Overlay "+" at 2631.85,435 h40 r180; Top Overlay "-" at 2176.85,435 h40 r180; Bottom Overlay "-" at 2251.85,435 h40 r180; Bottom Overlay "+" at 2571.85,435 h40 r180
D2: Bottom Overlay "+" at 3146.93,295.32 h40; Bottom Overlay "-" at 2891.02,295.32 h40
J1: Top Overlay "1" at 1065,1695 h60; Top Overlay "6" at 1065,1900 h60; Top Overlay "10" at 145,1910 h60
J2: Top Overlay "1" at 184.99,3037.6 h60 r180; Top Overlay "6" at 184.99,2832.6 h60 r180; Top Overlay "10" at 1104.99,2822.6 h60 r180
K1: Top Overlay "NC" at 1605,2345 h30 r180; Top Overlay "N0" at 1605,2535 h30 r180; Top Overlay "NO" at 1195,2545 h30 r180; Top Overlay "NC" at 1195,2335 h30 r180; Top Overlay "COM" at 1195,2445 h30 r180
K2: Top Overlay "NC" at 1605,3050 h30 r180; Top Overlay "N0" at 1605,3240 h30 r180; Top Overlay "NO" at 1195,3250 h30 r180; Top Overlay "NC" at 1195,3040 h30 r180; Top Overlay "COM" at 1195,3150 h30 r180
K3: Top Overlay "COIL" at 635,2135 h30 r180; Top Overlay "NC" at 585,2345 h30 r180; Top Overlay "N0" at 585,2535 h30 r180; Top Overlay "NO" at 175,2545 h30 r180; Top Overlay "NC" at 175,2335 h30 r180; Top Overlay "COM" at 175,2445 h30 r180
K4: Top Overlay "COIL" at 1145,2135 h30 r180; Top Overlay "NC" at 1095,2345 h30 r180; Top Overlay "N0" at 1095,2535 h30 r180; Top Overlay "NO" at 685,2545 h30 r180; Top Overlay "NC" at 685,2335 h30 r180; Top Overlay "COM" at 685,2445 h30 r180
K5: Top Overlay "NC" at 1600,1645 h30 r180; Top Overlay "N0" at 1600,1835 h30 r180; Top Overlay "NO" at 1190,1845 h30 r180; Top Overlay "NC" at 1190,1635 h30 r180; Top Overlay "COM" at 1190,1745 h30 r180
K6: Top Overlay "COIL" at 2200,40 h30 r180; Top Overlay "NC" at 2155,270 h30 r180; Top Overlay "N0" at 2155,460 h30 r180; Top Overlay "NO" at 1745,470 h30 r180; Top Overlay "NC" at 1745,260 h30 r180
P2: Top Overlay "FFKDSA1/H-2.54- 8" at 1430,3720 h50 r90; Top Overlay "Wires and Tabs" at 1195,3950 h30 r90; Top Overlay "1" at 1591.22,3660 h40 r90; Top Overlay "8" at 1525,4595 h40 r90; Bottom Overlay "1" at 1525,3735 h40 r90; Bottom Overlay "8" at 1525,4565 h40 r90
P3: Top Overlay "FFKDSA1/H-2.54- 8" at 1475,275 h30 r90; Top Overlay "Wires and Tabs" at 1215,325 h30 r90; Top Overlay "1" at 1585,35 h40 r90; Top Overlay "8" at 1585,975 h40 r90; Bottom Overlay "1" at 1585,115 h40 r90; Bottom Overlay "8" at 1585,945 h40 r90
U6: Top Overlay "Vin" at 2562,1083 h40 r90; Top Overlay "TAB" at 2020,807 h40 r90; Top Overlay "GND" at 2654,812 h40 r90